# Altium PCB PCB1.PcbDoc (part 4 of 4)
Units mm, origin at the board's own origin, x right, y up, seen from the top; angles counter-clockwise.
Board outline 45.9 x 24.5 mm, 4 copper layers (Top Layer, Signal Layer 1, Signal Layer 2, Bottom Layer), stack 1.021 mm thick; 157 components, 126 nets, 564 pads, 199 vias.
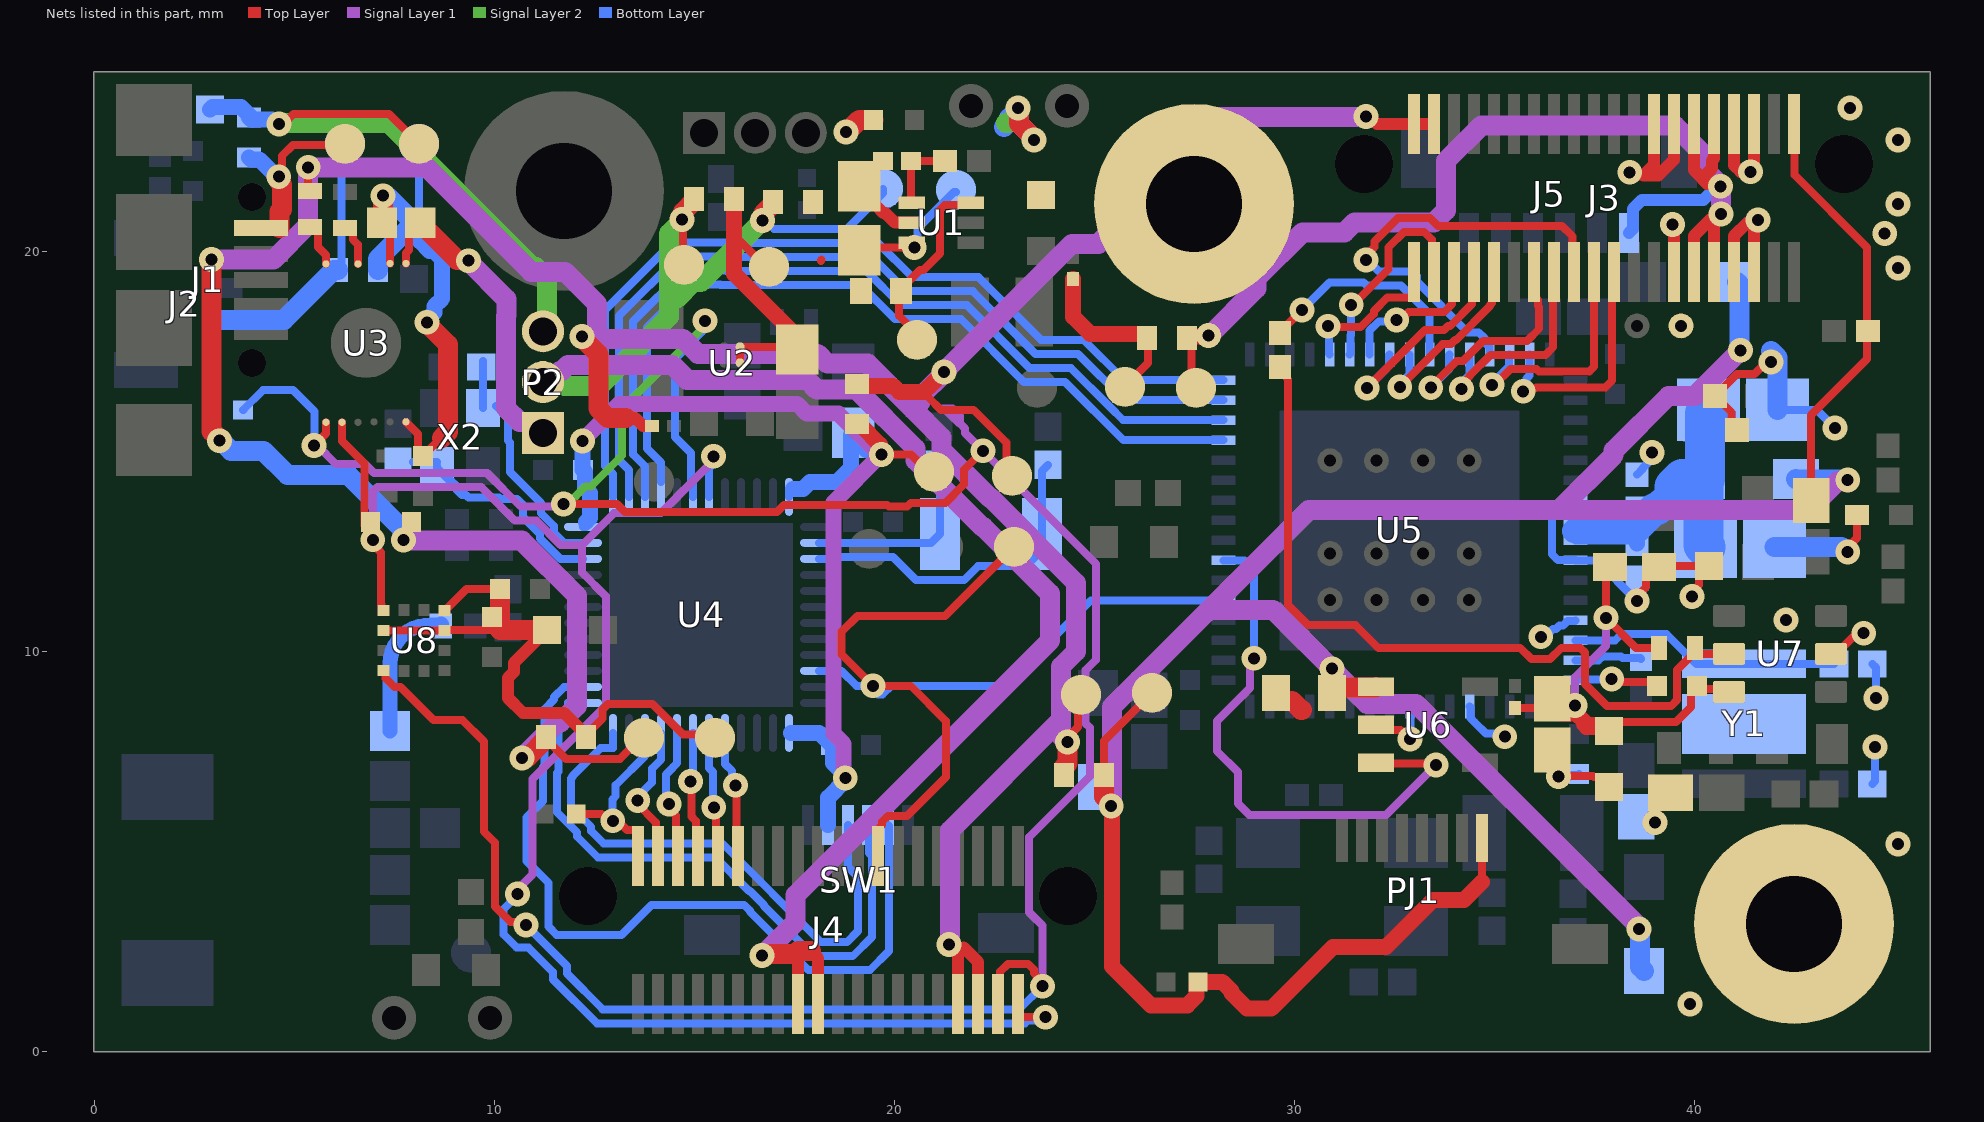
[diagram p5: the nets of this part, all layers, seen from the top]

## Via types
v1: diameter 0.62, hole 0.3, Top Layer to Bottom Layer, tented both sides, 176 vias
v2: diameter 0.62, hole 0.3, Top Layer to Bottom Layer, 17 vias
v3: diameter 0.6, hole 0.3, Top Layer to Bottom Layer, 6 vias

## Nets (pads, with @x,y where several pads share a name; then routed paths per layer and width w, separated by ;. In a path a pad name is that pad's centre, name@x,y a point inside that pad or via, vN(x,y) a via of type N, cw(c..) or ccw(c..) an arc to the next point about the centre after c; other vN are vias at no path point) (continued)
NetR3_1: R3.1 TP6.1 U1.6 | length 4.8
  Top Layer w0.2: TP6.1@20.575,17.8 20.575,17.955 20.13,18.4 20.13,19.025 20.13,19.075 20.175,19.075 20.65,19.55 20.739,19.55 21.15,19.961 21.15,21.053 21.267,21.17 21.86,21.17 U1.6@21.915,21.225
NetR4_1: R4.1 R7.2 U1.1 | length 1.9
  Top Layer w0.2: U1.1@20.445,21.225 20.425,21.245 R7.2@20.425,22.275 R4.1@21.25,22.275
NetR16_1: R16.1 U3.12 | length 1.1
  Top Layer w0.2: R16.1@5.4,20.625 5.5,20.625 5.6,20.525 5.6,20.125 5.8,19.925 U3.12@5.8,19.7
NetR17_2: R17.2 U3.10 | length 1.1
  Top Layer w0.2: R17.2@6.275,20.6 6.375,20.6 6.475,20.5 6.475,20.304 6.6,20.179 U3.10@6.6,19.7
NetR32_2: R32.2 R34.1 U7.5 | length 19.9
  Top Layer w0.2: R34.1@29.65,17.125 29.825,16.95 29.825,16.833 29.85,16.808 29.85,11.175 30.35,10.675 31.532,10.675 32.107,10.1 35.654,10.1 35.936,9.818 36.4,9.818 36.682,10.1 37.158,10.1 37.275,9.983 37.275,9.2 37.825,8.65 39.429,8.65 39.575,8.796 39.575,9.55 40.025,10 R32.2@40.025,10.05 ; R32.2@40.025,10.1 R32.2@40.025,10.05 ; U7.5@40.875,9.95 40.125,9.95 R32.2@40.025,10.05
P0.00/XL1: C19.2 U4.2 X1.1 | length 4.9
  Bottom Layer w0.2: U4.2@18.125,12.725 20.925,12.725 X1.1@21.15,12.95 21.15,14.65 C19.2@21.125,14.675
P0.01/XL2: C20.2 U4.3 X1.2 | length 8.3
  Bottom Layer w0.2: U4.3@18.125,12.325 18.5,12.325 18.525,12.35 18.62,12.35 18.645,12.375 19.971,12.375 20.546,11.8 21.754,11.8 22.104,12.15 23.3,12.15 23.7,12.55 23.7,14.525 C20.2@23.85,14.675
P0.21/Reset: SW1.3 U4.24 | length 14
  Bottom Layer w0.2: U4.24@12.975,7.975 12.975,7.6 12.666,7.6 11.96,6.894 11.96,6.867 11.921,6.828 11.921,6.136 12.43,5.627 12.43,5.524 12.74,5.214 15.705,5.214 18.176,2.742 18.822,2.742 19.1,3.02 19.1,4.375 18.85,4.625 SW1.3@18.85,5.675
PULP_RST: J4.01 R21.1 U4.22 | length 4.9
  Top Layer w0.2: R21.1@12.054,5.95 12.682,5.95 12.856,5.776 v1(12.97,5.776) ; v1@12.975,5.785 13.089,5.785 13.324,5.55 13.55,5.55 13.55,4.95 J4.01@13.6,4.9
  Bottom Layer w0.2: v1(12.97,5.776) 12.963,5.783 12.963,6.313 13.041,6.391 13.041,6.666 13.775,7.4 U4.22@13.775,7.975
PVCC: C22.2 C23.2 C30.1 C31.1 L11.2 U5.56 U5.57 | length 10.6
  Bottom Layer w0.2: U5.57@37.04,12.79 38.489,12.79 C31.1@38.575,12.704 ; U5.56@37.04,13.29 C23.2@38.315,13.29
  Bottom Layer w0.4: C31.1@38.575,12.704 38.575,13.137
  Bottom Layer w0.6: 37,13.025 37.112,13.137 38.315,13.137 38.575,13.137
  Bottom Layer w0.8: 38.575,13.137 38.792,13.354 39.008,13.571 39.089,13.571 39.411,13.893 39.411,14.025 39.511,14.125
  Bottom Layer w1: 39.511,14.125 39.711,14.325 L11.2@40.2,14.325 L11.2@40.243,14.325 ; C30.1@40.286,12.625 40.243,12.668 L11.2@40.243,14.325 ; C22.2@40.361,16.05 40.275,15.964 40.275,14.325 L11.2@40.243,14.325
RF: L5.2 R39.1 | length 3.8
  Bottom Layer w0.372: R39.1@7.4,8.025 7.4,9.708 cw(c8.354,9.708) L5.2@8.429,10.659
  Bottom Layer w0.4: L5.2@8.665,10.65 L5.2@8.435,10.659 ; L5.2@8.68,10.68 8.659,10.659 L5.2@8.435,10.659 ; L5.2@8.435,10.659 cw(c8.446,10.949) 8.433,10.659 8.429,10.659 L5.2@8.435,10.659
RxEn: R34.2 U5.42 | length 5.6
  Top Layer w0.2: R34.2@29.65,17.975 29.65,18 v1(30.2,18.55)
  Bottom Layer w0.2: v1(30.2,18.55) 30.887,19.237 31.743,19.237 31.817,19.162 32.673,19.162 33.39,18.445 U5.42@33.39,17.44
RxPwr: U5.23 U6.3 | length 14.4
  Top Layer w0.2: U6.3@32.052,7.225 32.065,7.213 33.508,7.213 v1(33.548,7.173)
  Signal Layer 1 w0.2: v1(29,9.839) 29,9.726 28.897,9.623 28.897,9.097 28.075,8.275 28.075,7.517 28.596,6.996 28.596,6.212 28.887,5.921 32.296,5.921 v1(33.548,7.173)
  Bottom Layer w0.2: U5.23@28.24,12.29 28.76,12.29 29,12.05 v1(29,9.839)
SCK: J4.25 TP10.1 U4.10 U5.21 | length 24.5
  Top Layer w0.2: J4.25@19.6,4.9 19.65,4.95 19.65,5.617 19.7,5.667 19.7,5.754 19.846,5.9 20.325,5.9 21.3,6.875 21.3,8.267 20.417,9.15 v1(19.476,9.15) 18.691,9.935 18.691,10.507 19.084,10.9 21.275,10.9 TP10.1@23,12.625
  Bottom Layer w0.2: U4.10@18.125,9.525 18.69,9.525 19.065,9.15 v1(19.476,9.15) ; v1@19.6,8.94 19.714,8.94 19.924,9.15 22.788,9.15 24.927,11.29 U5.21@28.24,11.29
SCL: J4.40 R20.2 U3.2 U4.43 U8.1 | length 44.2
  Top Layer w0.2: U3.2@6.2,15.74 6.2,15.271 6.76,14.711 6.76,13.155 6.81,13.105 6.81,13.076 6.97,12.916 6.97,12.689 7.175,12.484 7.175,11.195 7.185,11.185 7.185,11.078 7.225,11.038 U8.1@7.237,11.038 ; J4.40@23.1,1.2 23.1,0.917 23.15,0.867 v1(23.783,0.867)
  Signal Layer 1 w0.2: v1(6.97,12.802) 6.97,14.008 7.087,14.125 9.68,14.125 10.525,13.28 11.06,13.28 11.665,12.675 12.204,12.675 ; v1(10.585,3.946) 10.585,4.059 10.96,4.434 10.96,6.818 12.8,8.658 12.8,11.382 12.204,11.978 12.204,12.675 ; v1(15.485,14.89) 15.485,14.785 14.175,13.475 13.004,13.475 12.204,12.675
  Bottom Layer w0.2: v1(10.585,3.946) 10.585,3.911 10.24,3.566 10.24,2.938 10.568,2.61 10.857,2.61 11.476,1.991 11.476,1.812 12.573,0.715 23.278,0.715 23.349,0.786 23.703,0.786 v1(23.783,0.867) ; U4.43@15.375,13.875 15.375,14.576 15.405,14.606 15.405,14.81 v1(15.485,14.89)
SDA: J4.38 R19.2 U3.1 U4.42 U8.4 | length 75.6
  Top Layer w0.2: v1(5.5,15.16) 5.8,15.46 U3.1@5.8,15.74 ; U8.4@7.25,9.537 7.29,9.497 7.29,9.339 7.36,9.269 7.506,9.122 7.665,9.122 8.487,8.3 9.206,8.3 9.75,7.756 9.75,5.504 10.025,5.229 10.025,3.636 10.411,3.25 10.72,3.25 v1(10.8,3.17) ; v1(11.737,13.697) 13.077,13.697 13.274,13.5 17.078,13.5 17.253,13.675 19.831,13.675 19.87,13.635 20.331,13.635 20.42,13.725 21.286,13.725 21.75,14.189 21.75,14.554 v2(22.223,15.027) ; J4.38@22.6,1.2 22.65,1.25 22.65,2.004 22.846,2.2 23.354,2.2 23.5,2.054 23.5,1.966 23.71,1.756 v1(23.71,1.642)
  Signal Layer 1 w0.2: v1(5.5,15.16) 5.584,15.16 6.044,14.7 6.775,14.7 7,14.475 9.825,14.475 10.67,13.63 11.67,13.63 v1(11.737,13.697) ; 21.164,16.087 21.263,16.087 ; 21.64,15.71 21.263,16.087 ; v2@22.175,15.027 v2(22.223,15.027) 25.05,12.201 25.05,9.803 24.788,9.541 24.788,8.212 24.893,8.107 24.893,6.885 23.375,5.367 23.375,3.496 23.71,3.161 v1(23.71,1.642) ; v2(22.223,15.027) 21.778,15.472 21.778,15.586 21.647,15.717 21.647,15.901 21.461,16.087 21.263,16.087
  Signal Layer 2 w0.2: v1(11.737,13.697) 11.848,13.697 12.289,14.139 12.431,14.139 13.195,14.903 13.195,16.07 15.276,18.151 v1(15.276,18.276)
  Bottom Layer w0.2: R19.2@3.72,16.053 3.732,16.053 4.23,16.55 4.972,16.55 5.51,16.012 5.51,15.17 v1(5.5,15.16) ; v1(10.8,3.17) 11.826,2.144 11.826,1.957 12.718,1.065 23.133,1.065 v1(23.71,1.642) ; U4.42@14.975,13.875 14.975,14.25 14.925,14.3 14.925,14.975 14.525,15.375 14.525,17.324 v1@15.195,17.994
SIGNAL_RX: C45.1 J3.39 R33.2 | length 10.8
  Top Layer w0.2: J3.39@42.5,23.2 42.51,23.19 42.51,21.927 44.325,20.112 44.325,18.025 44.325,17.325 42.925,15.925 C45.1@42.925,13.781
Spare1_MSP_AFE: J3.14 U5.43 | length 5.8
  Top Layer w0.2: v1(33.419,16.603) 33.419,16.626 34.069,17.275 34.225,17.275 34.725,17.775 35.825,17.775 36.129,18.079 36.129,18.617 36.1,18.646 36.1,18.8 36,18.9 J3.14@36,19.5
  Bottom Layer w0.2: v1(33.419,16.603) 33.87,17.054 33.87,17.141 33.87,17.42 U5.43@33.89,17.44
Spare1_NRF_MSP: U4.40 U5.29 | length 20.5
  Bottom Layer w0.2: U4.40@14.175,14.25 14.175,14.735 13.825,15.085 13.825,18.112 14.899,19.186 15.653,19.186 15.664,19.175 19.165,19.175 20.024,18.316 21.679,18.316 23.245,16.75 24.275,16.75 25.734,15.291 U5.29@28.24,15.291
Spare1_NRF_WOLF: J4.11 U4.17 | length 3.2
  Top Layer w0.2: v1(16.034,6.664) 16.066,6.633 16.066,4.934 J4.11@16.1,4.9
  Bottom Layer w0.2: U4.17@15.775,7.975 15.775,7.2 15.954,7.021 15.954,6.744 v1(16.034,6.664)
Spare2_MSP_AFE: J3.16 U5.44 | length 5.6
  Top Layer w0.2: v1(34.189,16.572) 34.189,16.685 34.392,16.888 34.392,16.908 34.909,17.425 36.287,17.425 36.479,17.617 36.479,19.479 J3.16@36.5,19.5
  Bottom Layer w0.2: v1(34.189,16.572) 34.189,16.718 34.39,16.919 U5.44@34.39,17.44
Spare2_NRF_MSP: U4.39 U5.30 | length 21.4
  Bottom Layer w0.2: U4.39@13.775,13.875 13.775,14.64 13.475,14.94 13.475,18.257 14.754,19.536 15.798,19.536 15.809,19.525 19.31,19.525 20.169,18.666 21.824,18.666 23.39,17.1 24.42,17.1 25.385,16.135 25.729,15.791 U5.30@28.24,15.791
Spare2_NRF_WOLF: J4.09 U4.18 | length 3.2
  Top Layer w0.2: v1(15.496,6.114) 15.55,6.059 15.55,4.95 J4.09@15.6,4.9
  Bottom Layer w0.2: U4.18@15.375,7.975 15.375,7.094 15.474,6.994 15.474,6.135 v1(15.496,6.114)
Spare3_MSP_AFE: J3.18 U5.45 | length 11.1
  Top Layer w0.2: v1(31.8,19.797) 31.8,19.91 32.01,20.12 32.01,20.259 32.601,20.85 32.79,20.85 33.399,20.85 33.599,20.65 36.702,20.65 36.964,20.388 36.964,19.536 J3.18@37,19.5
  Bottom Layer w0.2: v1(31.8,19.797) 31.843,19.797 32.127,19.512 32.956,19.512 33.073,19.395 33.073,19.257 34.34,17.99 34.614,17.99 34.76,17.844 34.76,17.75 34.89,17.62 U5.45@34.89,17.44
Spare3_NRF_MSP: U4.38 U5.31 | length 21.8
  Bottom Layer w0.2: U4.38@13.375,13.875 13.375,14.545 13.125,14.795 13.125,18.402 14.609,19.886 15.943,19.886 15.954,19.875 19.455,19.875 20.314,19.016 21.969,19.016 23.535,17.45 24.6,17.45 25.759,16.291 U5.31@28.24,16.291
Spare3_NRF_WOLF: J4.07 U4.19 | length 3.2
  Top Layer w0.2: v1(14.914,6.763) 14.936,6.741 14.936,5.882 15.05,5.767 15.05,4.95 J4.07@15.1,4.9
  Bottom Layer w0.2: v1(14.914,6.763) 14.975,6.823 U4.19@14.975,7.975
Spare4_MSP_AFE: J3.22 U5.47 | length 6.1
  Top Layer w0.2: v1(35.73,16.515) 35.81,16.595 36.042,16.595 36.057,16.61 37.781,16.61 37.95,16.779 37.95,19.45 J3.22@38,19.5
  Bottom Layer w0.2: v1(35.73,16.515) 35.81,16.595 35.81,16.833 35.89,16.912 U5.47@35.89,17.44
Spare4_NRF_MSP: U4.37 U5.32 | length 22.3
  Bottom Layer w0.2: U4.37@12.975,13.875 12.975,14.45 12.775,14.65 12.775,18.547 14.464,20.236 16.088,20.236 16.098,20.225 19.6,20.225 20.459,19.366 22.114,19.366 23.68,17.8 24.745,17.8 25.754,16.791 U5.32@28.24,16.791
Spare4_NRF_WOLF: J4.05 U4.20 | length 3.3
  Top Layer w0.2: v1(14.376,6.196) 14.376,6.082 14.55,5.908 14.55,4.95 J4.05@14.6,4.9
  Bottom Layer w0.2: v1(14.376,6.196) 14.298,6.273 14.298,6.933 14.475,7.11 14.475,7.115 14.575,7.215 U4.20@14.575,7.975
Spare5_NRF_WOLF: J4.03 U4.21 | length 3.5
  Top Layer w0.2: v1(13.591,6.287) 13.591,6.188 14.05,5.73 14.05,4.95 J4.03@14.1,4.9
  Bottom Layer w0.2: v1(13.591,6.287) 13.591,6.382 13.948,6.739 13.948,7.078 14.175,7.305 U4.21@14.175,7.975
SWDCLK: SW1.4 U4.25 | length 15.7
  Bottom Layer w0.2: U4.25@12.225,8.725 11.85,8.725 11.85,8.425 11.61,8.185 11.61,7.012 11.571,6.973 11.571,5.991 12.08,5.482 12.08,5.379 12.595,4.864 15.536,4.864 16.375,4.025 16.399,4.025 16.75,3.674 16.75,3.65 18.008,2.392 18.967,2.392 19.45,2.875 19.45,4.9 19.375,4.975 19.375,5.65 SW1.4@19.35,5.675
SWDIO: SW1.5 U4.26 | length 20
  Bottom Layer w0.2: U4.26@12.225,9.125 11.755,9.125 11.5,8.87 11.5,8.807 11.26,8.567 11.26,7.157 11.221,7.118 11.221,6.271 10.815,5.865 10.815,4.771 11.36,4.226 11.36,3.132 11.567,2.925 13.188,2.925 13.938,3.675 16.254,3.675 16.4,3.529 16.4,3.505 17.863,2.042 19.395,2.042 19.875,2.522 19.875,5.65 SW1.5@19.85,5.675
Switch_CLK: J3.04 U5.38 | length 4.9
  Top Layer w0.2: v1(31.43,18.677) 31.472,18.677 32.36,19.565 32.36,20.114 32.746,20.5 32.935,20.5 33.254,20.5 33.45,20.304 33.45,20 J3.04@33.5,19.95 ; J3.04@33.459,19.541 J3.04@33.5,19.5
  Bottom Layer w0.2: U5.38@31.39,17.44 31.41,17.46 31.41,17.907 31.43,17.926 v1(31.43,18.677)
Switch_CLR: J3.02 U5.37 | length 3.8
  Top Layer w0.2: v1(30.852,18.141) 30.876,18.117 31.662,18.117 31.997,18.452 31.997,18.525 32.333,18.86 32.95,18.86 33,18.91 J3.02@33,19.5
  Bottom Layer w0.2: v1(30.852,18.141) 30.871,18.122 30.871,17.459 U5.37@30.89,17.44
Switch_D_IN: J3.06 U5.39 | length 3.8
  Top Layer w0.2: v1(32.565,18.3) 32.664,18.3 32.864,18.5 33.754,18.5 33.95,18.696 33.95,19.45 J3.06@34,19.5
  Bottom Layer w0.2: U5.39@31.89,17.44 31.89,17.937 31.89,18.03 32.123,18.264 32.528,18.264 v1(32.565,18.3)
Switch_D_OUT: J3.08 U5.40 | length 5.4
  Top Layer w0.2: v1(31.825,16.6) 33.272,18.047 33.747,18.047 33.85,18.15 33.904,18.15 34.45,18.696 34.45,19.45 J3.08@34.5,19.5
  Bottom Layer w0.2: v1(31.825,16.6) 32.26,17.035 32.37,17.145 32.37,17.42 U5.40@32.39,17.44
Switch_LE: J3.10 U5.41 | length 4.9
  Top Layer w0.2: v1(32.645,16.625) 33.718,17.697 33.922,17.697 34.025,17.8 34.054,17.8 34.9,18.646 34.9,18.675 34.95,18.725 34.95,19.45 J3.10@35,19.5
  Bottom Layer w0.2: v1(32.645,16.625) 32.645,16.691 32.89,16.936 U5.41@32.89,17.44
TxPwr: J3.20 U5.46 | length 6.1
  Top Layer w0.2: v1(34.952,16.676) 35.016,16.676 35.415,17.075 36.057,17.075 36.12,17.012 37.383,17.012 37.5,17.129 J3.20@37.5,19.5
  Bottom Layer w0.2: v1(34.952,16.676) 34.952,16.714 35.375,17.138 35.375,17.425 U5.46@35.39,17.44
USS_GND: C1.2 C2.2 C22.1 C23.1 C24.2 C27.1 C30.2 C31.2 C33.1 C36.1 C39.1 C40.1 C42.2 C43.2 C46.1 C47.2 C48.2 J3.25 J3.27 J3.28 J3.33 J3.34 J3.35 J3.36 M2.1 M4.1 NT1.1 R2.2 R7.1 R24.2 R25.2 R38.1 U1.2 U5.5 U5.8 U5.55 U5.58 U5.61 U5.64 U6.2 U7.2 Y1.2 | length 51.5
  Top Layer w0.2: U1.2@20.445,20.725 U1.2@20.5,20.78 ; U6.2@32.052,8.175 32.181,8.046 32.665,8.046 32.888,7.823 v1(32.898,7.823) ; C40.1@36.45,7.544 36.615,7.379 v1(36.615,6.887) 36.628,6.9 37.475,6.9 37.5,6.875 37.625,6.875 C47.2@37.875,6.625 ; v1(37.943,9.324) 38.023,9.244 38.981,9.244 C42.2@39.075,9.15 ; v1(38.572,11.275) 38.572,11.389 38.8,11.617 38.8,11.875 39.075,12.15 C48.2@40.375,12.15 40.125,11.9 40.125,11.676 39.95,11.501 v1(39.95,11.387) ; v1(39.027,5.731) 39.027,6.119 39.383,6.475 C43.2@39.409,6.475 ; J3.33@40.95,23.15 J3.33@41,23.2 ; R24.2@41.075,15.55 40.942,15.683 40.942,15.983 R25.2@40.525,16.4 41.075,16.95 41.511,16.95 41.811,17.25 v1(41.925,17.25) ; U7.2@43.425,9.95 43.55,9.95 43.987,10.387 44.161,10.387 v1(44.241,10.468) ; v1(43.841,12.5) 43.841,12.614 44.075,12.848 C46.1@44.075,13.425
  Top Layer w0.3: C2.2@19.13,21.643 19.13,21.545 19.511,21.164 19.54,21.164 19.737,20.968 19.785,20.968 20.023,20.73 20.44,20.73 U1.2@20.445,20.725 ; C2.2@19.175,21.786 19.511,22.122 19.547,22.122 19.7,22.275 R7.1@19.725,22.275 ; v1(38.392,21.99) 38.453,21.929 38.72,21.929 38.738,21.911 ; J3.25@39,23.2 39,22.174 38.738,21.911 ; v1(39.461,20.685) 39.5,20.646 J3.28@39.5,19.5 ; J3.27@39.5,23.2 39.5,22.3 39.111,21.911 38.738,21.911 ; J3.34@41,19.5 41,20.4 41.339,20.739 41.539,20.739 v1(41.6,20.8) 41.6,20.713 41.5,20.613 J3.36@41.5,19.5 ; J3.33@41,23.2 41,22.164 41.164,22 41.407,22 v1@41.407,21.918 ; v1@41.479,22.024 41.479,22.142 41.5,22.164 J3.35@41.5,23.2
  Top Layer w0.5: v1@18.775,22.95 18.782,22.95 19.132,23.3 R2.2@19.487,23.3 ; v1(23.1,23.6) 23.123,23.577 23.123,23.21 23.5,22.833 v1(23.5,22.8) ; C39.1@29.55,8.975 29.55,8.875 29.65,8.775 29.95,8.775 30.175,8.55 30.2,8.55
  Signal Layer 1 w0.5: v1(23.1,23.6) 23.123,23.577 23.123,23.21 23.5,22.833 v1(23.5,22.8)
  Signal Layer 2 w0.5: 22.8,23.225 22.875,23.225 22.925,23.275 ; v1(23.1,23.6) 23.123,23.577 23.123,23.21 23.5,22.833 v1(23.5,22.8)
  Bottom Layer w0.2: U5.8@32.89,8.64 32.91,8.62 32.91,7.915 32.898,7.903 v1(32.898,7.823) ; U5.5@34.39,8.64 34.41,8.62 34.41,8.346 34.52,8.236 34.796,7.96 35.19,7.96 v1(35.271,7.88) ; v1(36.168,10.378) 36.282,10.378 36.477,10.573 36.55,10.573 36.636,10.659 36.639,10.659 36.73,10.659 36.84,10.769 37.02,10.769 U5.61@37.04,10.789 ; v1(36.615,6.887) 36.646,6.919 37.094,6.919 C27.1@37.125,6.95 ; U5.64@37.04,9.289 37.058,9.307 37.925,9.307 v1(37.943,9.324) ; U5.55@37.04,13.79 37.02,13.77 36.747,13.77 36.45,13.474 36.45,12.442 36.567,12.325 36.575,12.325 36.603,12.297 37.033,12.297 U5.58@37.04,12.29 37.557,12.29 v1(38.572,11.275) ; C23.1@38.575,14.429 38.728,14.582 38.728,14.603 38.872,14.747 38.872,14.905 v1(38.952,14.985) ; C30.2@42.014,12.625 42.139,12.5 43.809,12.5 v1(43.841,12.5) ; C22.1@42.089,16.05 43.075,16.05 v1(43.525,15.6) ; C33.1@44.457,6.7 44.525,6.768 v1(44.525,7.625) ; C36.1@44.457,9.7 44.55,9.607 v1(44.55,8.85)
  Bottom Layer w0.5: 22.75,23.125 22.875,23.25 22.875,23.343 23.1,23.568 v1(23.1,23.6) 23.123,23.577 23.123,23.21 23.5,22.833 v1(23.5,22.8) ; v1@41.925,17.527 42.089,17.363 C22.1@42.089,16.05 ; C30.2@42.014,12.625 43.684,12.625 v1@43.809,12.5
  other v1: 39.9,1.2 45.1,5.2 42.3,10.8 45.1,19.6 44.766,20.457 45.1,21.2 41.409,22.002 45.1,22.8 18.8,23 43.9,23.6
USSXTIN: C36.2 U5.62 Y1.3 | length 6.8
  Bottom Layer w0.2: U5.62@37.04,10.289 38.03,10.289 38.19,10.45 39.306,10.45 40.056,9.7 Y1.3@41.25,9.7 C36.2@43.5,9.7
USSXTOUT: R28.2 U5.63 | length 1.7
  Bottom Layer w0.2: U5.63@37.04,9.789 37.616,9.789 37.711,9.884 38.175,9.884 38.217,9.842 38.658,9.842 R28.2@38.675,9.825
VBAT: P2.1 R18.2 U3.7 | length 8
  Top Layer w0.2: U3.7@7.8,19.71 7.8,19.973 7.871,20.044 7.871,20.445 R18.2@8.151,20.725
  Top Layer w0.5: R18.2@8.151,20.725 R18.2@8.281,20.595 ; R18.2@8.281,20.594 9.073,19.802 9.337,19.802 v1(9.36,19.779)
  Signal Layer 1 w0.5: v1(9.36,19.779) 9.36,19.765 10.306,18.819 10.306,18.404 10.3,18.398 10.3,16.093 10.643,15.75 10.95,15.75 P2.1@11.225,15.475
VBAT_CONN: J2.1 R5.1 TP4.1 | length 6.6
  Bottom Layer w0.2: R5.1@6.1,19.55 6.188,19.637 6.188,22.613 TP4.1@6.275,22.7
  Bottom Layer w0.5: J2.1@3.215,18.3 4.75,18.3 6,19.55 R5.1@6.1,19.55
VBAT_IN: C7.1 C8.1 R5.2 R18.1 TP5.1 U3.6 U3.8 | length 14.3
  Top Layer w0.2: R18.1@7.225,20.751 R18.1@7.199,20.725 7.4,20.524 U3.8@7.4,19.71 ; U3.6@7.8,15.75 8.1,15.45 8.1,15.025 C7.1@8.225,14.9 8.675,15.35 8.7,15.35
  Top Layer w0.5: R18.1@7.225,20.751 v1(7.225,21.405) ; v1(8.325,18.24) 8.325,18.208 8.85,17.683 8.85,15.5 8.7,15.35
  Bottom Layer w0.2: C8.1@8,20.725 8.125,20.85 TP5.1@8.125,22.7
  Bottom Layer w0.4: C8.1@8,20.725 8.15,20.575 8.15,20.259 8.384,20.025 8.495,20.025 8.7,19.82 8.7,18.83 8.51,18.64 8.51,18.485 8.325,18.3 v1(8.325,18.24)
  Bottom Layer w0.5: R5.2@7.1,19.55 7.1,19.825 C8.1@8,20.725 7.343,21.382 7.248,21.382 v1(7.225,21.405)
VCC_AFE: J3.29 J3.30 J3.31 J3.32 J5.6 R8.2 TP14.1 | length 28.8
  Top Layer w0.2: R8.2@27.325,17.85 27.437,17.738 27.437,16.713 TP14.1@27.55,16.6
  Top Layer w0.3: J3.30@40,19.5 40,20.4 v1@40.437,20.837 ; J3.29@40,23.2 40,22.048 40.176,21.872 40.237,21.872 40.45,22.085 40.45,22.285 40.5,22.335 J3.31@40.5,23.2 ; 40.195,21.83 40.326,21.699 40.602,21.699 v1(40.663,21.638) ; J3.32@40.5,19.5 40.5,20.775 v1(40.675,20.95)
  Top Layer w0.4: R8.2@27.325,17.85 27.355,17.88 27.835,17.88 v1(27.865,17.91)
  Signal Layer 1 w0.5: v1(27.865,17.91) 27.885,17.91 29.057,19.082 29.057,19.332 30.215,20.49 31.261,20.49 31.506,20.735 33.496,20.735 33.796,21.035 33.796,22.271 34.681,23.156 39.519,23.156 40.179,22.496 40.179,22.155 40.663,21.67 v1(40.663,21.638) ; v1@40.666,21.641 40.669,21.639 40.669,20.956 v1(40.675,20.95)
  Bottom Layer w0.3: J5.6@38.375,20.475 38.475,20.575 38.475,21.074 38.696,21.295 40.233,21.295 40.576,21.638 v1(40.663,21.638)
VCC_IMU: C49.1 C50.1 C51.1 R13.2 TP22.1 U8.2 U8.9 U8.10 | length 15.2
  Top Layer w0.2: U8.2@7.237,10.537 U8.9@8.762,10.537 ; U8.10@8.762,11.038 8.775,11.038 9.312,11.575 C51.1@10.15,11.575 ; U8.9@8.769,10.544 10.144,10.544 ; C49.1@10.119,10.869 C49.1@10.125,10.875 ; R13.2@12.3,7.925 12.709,8.334 12.709,8.559 12.85,8.7 13.961,8.7 14.725,7.936 15.439,7.936 TP22.1@15.525,7.85
  Top Layer w0.3: C50.1@11.325,10.55 10.5,9.725 10.5,9.501 10.35,9.351 10.35,8.845 10.72,8.475 11.75,8.475 R13.2@12.3,7.925
  Top Layer w0.5: C51.1@10.15,11.575 10.15,10.55 C50.1@11.325,10.55 ; R13.2@12.3,7.875 R13.2@12.3,7.925
VCC_MSP430: C39.2 L8.1 L9.1 L10.1 L11.1 PJ1.1 R11.2 R29.1 TP20.1 U6.1 | length 69.8
  Top Layer w0.2: R11.2@25.25,6.925 25.25,7.775 TP20.1@26.45,8.975 ; 28.206,1.75 28.249,1.75 28.486,1.513 ; 34.7,4.25 PJ1.1@34.7,5.35
  Top Layer w0.4: v1(25.43,6.15) 25.45,6.13 25.45,2.133 26.419,1.164 27.334,1.164 27.568,1.398 27.568,1.716 R29.1@27.602,1.75 28.206,1.75 28.44,1.516 28.44,1.467 28.827,1.08 29.43,1.08 30.975,2.625 32.3,2.625 33.475,3.8 34.25,3.8 34.7,4.25
  Top Layer w0.5: v1@25.25,6.382 R11.2@25.25,6.925 ; v1(30.95,9.58) C39.2@30.95,8.975 30.95,9.004 31.05,9.104 32.031,9.104 U6.1@32.052,9.125
  Signal Layer 1 w0.5: v1(25.43,6.15) 25.45,6.17 25.45,8.625 27.912,11.088 ; v1(38.625,3.075) 38.625,3.107 38.565,3.167 38.565,3.185 33.05,8.7 31.83,8.7 v1(30.95,9.58) 29.48,11.05 27.95,11.05 27.912,11.088 ; v1(41.161,17.539) 40.019,16.398 39.361,16.398 37.993,15.03 37.993,14.918 36.625,13.55 ; v1(43.841,14.3) 43.818,14.277 43.602,14.277 42.875,13.55 36.625,13.55 ; 27.912,11.088 30.375,13.55 36.625,13.55
  Bottom Layer w0.5: v1(38.625,3.075) 38.648,3.052 38.648,2.127 L8.1@38.75,2.025 ; L10.1@41.075,19.25 41.138,19.187 41.138,17.562 v1(41.161,17.539) ; L11.1@42.55,14.325 42.563,14.312 43.829,14.312 v1(43.841,14.3)
VCC_NRF52: C14.1 C15.1 C16.1 R10.2 SW1.2 TP18.1 U4.13 U4.36 U4.48 | length 29.4
  Top Layer w0.2: v1@19.643,14.978 v1(19.685,14.935) 20.423,14.935 20.934,14.425 TP18.1@21.15,14.425
  Top Layer w0.4: R10.2@19.075,15.7 19.125,15.65 19.175,15.65 19.643,15.182 v1@19.643,14.978
  Signal Layer 1 w0.4: v1(12.21,15.274) 13.136,16.2 17.575,16.2 17.821,15.954 18.607,15.954 19.626,14.935 v1(19.685,14.935) 18.481,13.731 18.481,7.96 18.741,7.7 18.741,6.892 v1(18.783,6.85)
  Bottom Layer w0.2: U4.36@12.225,13.125 12.3,13.125 12.3,13.25 ; U4.13@17.375,7.975 U4.13@17.425,7.975 ; U4.48@17.375,13.875 17.375,14.075 17.475,14.075
  Bottom Layer w0.4: v1(12.21,15.274) 12.21,14.565 12.275,14.5 12.275,14.093 12.397,13.971 12.397,13.347 12.3,13.25 ; U4.13@17.425,7.975 18.125,7.975 18.475,7.625 18.475,7.217 18.741,6.952 18.741,6.91 v1@18.681,6.85 ; 17.475,14.075 17.725,14.075 17.9,14.25 18.575,14.25 18.925,14.6 18.925,15.425 19.304,15.046 19.515,15.046 19.626,14.935 v1(19.685,14.935) ; SW1.2@18.35,5.675 18.35,6.358 18.783,6.79 v1(18.783,6.85)
VCC_RX: C40.2 C42.1 C47.1 FB3.2 R32.1 R37.2 U7.6 | length 13.6
  Top Layer w0.2: FB3.2@35.525,8.6 36.225,8.6 C40.2@36.45,8.825 36.532,8.742 36.615,8.66 v1(37.023,8.66) ; v1@37.01,8.359 37.156,8.213 37.156,8.142 37.273,8.025 C47.1@37.875,8.025 38.1,8.25 39.553,8.25 39.925,8.622 39.925,9 C42.1@40.075,9.15 40.15,9.075 40.8,9.075 U7.6@40.875,9 ; R37.2@37.9,12.125 37.8,12.025 v1(37.8,10.852) 38.552,10.1 R32.1@39.125,10.1
  Top Layer w0.4: C40.2@36.532,8.742 36.532,8.633 36.706,8.459 37.051,8.459 37.336,8.175 37.725,8.175 C47.1@37.875,8.025
  Signal Layer 1 w0.2: v1(37.023,8.66) 37.023,9.367 37.8,10.144 v1(37.8,10.852)
VSYS_3V3: FB1.2 R8.1 TP13.1 | length 4.5
  Top Layer w0.2: TP13.1@25.75,16.65 25.775,16.65 26.35,17.225 26.35,17.825 R8.1@26.325,17.85
  Top Layer w0.4: FB1.2@24.475,19.325 24.475,18.375 24.9,17.95 26.275,17.95 26.325,17.9 R8.1@26.325,17.85
VSYS_3V3_IN: C2.1 R3.2 R6.2 TP12.1 U1.3 | length 3.3
  Top Layer w0.2: 18.175,19.775 18.175,19.8 18.187,19.812 ; C2.1@19.13,20.039 19.201,20.11 v1(20.507,20.11)
  Bottom Layer w0.2: v1(20.507,20.11) 20.588,20.19 20.588,20.588 21.5,21.5 TP12.1@21.544,21.5
VSYS_IN: J4.18 J4.20 P2.2 R6.1 R9.1 TP11.1 TP15.1 | length 45.9
  Top Layer w0.2: TP15.1@14.725,19.7 v1@14.725,20.785
  Top Layer w0.3: v1(16.703,2.41) v1@16.743,2.45 ; J4.18@17.6,1.2 17.6,2.525 ; 17.924,2.525 18.1,2.349 J4.20@18.1,1.2
  Top Layer w0.5: TP15.1@14.725,19.7 TP15.1@14.75,19.675 ; v1@14.725,20.785 14.723,20.787 14.723,20.998 15,21.275 R9.1@15,21.325 ; v1(16.71,20.785) 16.733,20.808 16.733,20.958 16.975,21.2 R6.1@16.975,21.25 ; v1@16.743,2.45 17.487,2.45 ; 17.6,2.525 17.924,2.525
  Signal Layer 1 w0.5: P2.2@11.25,16.621 11.649,17.02 11.695,17.02 11.85,17.175 14.453,17.175 14.828,16.8 17.824,16.8 18.069,16.554 19.071,16.554 20.539,15.086 20.539,14.788 22.206,13.121 22.233,13.121 23.9,11.454 23.9,10.279 17.54,3.919 17.54,3.247 v1(16.703,2.41)
  Signal Layer 2 w0.5: P2.2@11.65,16.75 11.755,16.645 12.649,16.645 13.663,17.659 13.663,17.673 14.375,18.385 14.375,18.387 14.375,18.579 14.375,18.829 14.375,20.457 14.7,20.782 v1(14.7,20.81) ; 14.566,18.829 14.982,19.245 15.17,19.245 v1(16.71,20.785)
  Bottom Layer w0.2: 16.999,20.575 18.825,20.575 19.725,21.475 TP11.1@19.725,21.575
  Bottom Layer w0.5: P2.2@11.275,16.775 11.3,16.775 P2.2@11.325,16.75
VSYS_MCU: FB2.2 J3.01 J3.03 J4.34 J4.36 R10.1 R11.1 R13.1 R16.2 R19.1 R20.1 TP17.1 TP19.1 TP21.1 | length 95.3
  Top Layer w0.2: v1(5.353,22.115) 5.353,21.572 R16.2@5.4,21.525 ; R13.1@11.3,7.825 11.8,7.325 13.144,7.325 13.669,7.85 TP21.1@13.75,7.85 ; 20.855,16.605 20.855,16.367 21.173,16.05 21.992,16.05 22.783,15.259 22.783,15.255 22.808,15.23 22.808,14.517 22.925,14.4 TP17.1@22.95,14.4 ; v1(24.333,7.745) 24.333,7.859 24.6,8.125 24.6,8.85 TP19.1@24.675,8.925
  Top Layer w0.3: 13.3,15.845 13.53,15.845 13.725,15.65 FB2.2@13.95,15.65 ; J4.34@21.6,1.2 21.6,2.363 ; 21.736,2.614 22.1,2.25 J4.36@22.1,1.2 ; v1(31.801,23.384) 31.888,23.384 32.072,23.2 J3.03@33.5,23.2
  Top Layer w0.4: R10.1@19.075,16.7 19.125,16.65 19.975,16.65 20.125,16.5 20.75,16.5 ; 20.855,16.605 v1(21.25,17)
  Top Layer w0.5: v1(2.94,19.81) 2.94,15.512 3.14,15.312 v1(3.14,15.28) ; v1(10.7,7.35) 10.723,7.373 10.848,7.373 11.3,7.825 R13.1@11.3,7.875 ; v1(12.201,17.885) 12.201,17.853 12.61,17.444 12.61,16.079 12.844,15.845 13.3,15.845 ; R11.1@24.25,6.925 24.25,7.121 24.333,7.205 v1(24.333,7.745)
  Signal Layer 1 w0.5: v1(2.94,19.81) 4.49,19.81 5.35,20.67 5.35,22.115 8.31,22.115 10.925,19.5 11.775,19.5 12.575,18.7 12.575,17.885 ; v1(7.74,12.795) 7.755,12.78 10.695,12.78 12.075,11.4 12.075,8.65 11.664,8.239 11.589,8.239 v1(10.7,7.35) ; v1(12.201,17.885) 12.575,17.885 ; v1(21.375,2.685) 21.397,2.707 21.397,5.528 24.177,8.307 ; v1(24.333,7.745) 24.177,7.901 24.177,8.307 ; v1(31.801,23.384) 31.793,23.375 26.988,23.375 25.6,21.987 25.6,20.693 25.107,20.2 24.45,20.2 v1(21.25,17) 21.25,16.968 20.664,16.382 20.664,16.25 20.479,16.065 ; 12.575,17.885 12.575,17.825 14.723,17.825 15.098,17.45 18.093,17.45 18.339,17.204 19.34,17.204 20.479,16.065 ; 20.479,16.065 21.189,15.355 21.189,15.057 22.403,13.843 22.431,13.843 24.55,11.723 24.55,10.01 24.177,9.637 24.177,8.307
  Bottom Layer w0.5: v1(3.14,15.28) 3.172,15.28 3.425,15.028 R19.1@3.72,15.028 4.233,15.028 4.84,14.42 6.357,14.42 7.717,13.059 7.717,12.818 v1(7.74,12.795)
VSYS_MCU_IN: C3.1 R9.2 TP16.1 U2.B1 U2.C1 | length 7.6
  Top Layer w0.2: 16,20.388 16.037,20.388 16.8,19.625 TP16.1@16.875,19.625 ; U2.B1@16.15,17.225 U2.C1@16.15,17.625 17.405,17.625 C3.1@17.55,17.48 ; C3.1@17.45,18 17.55,17.9 C3.1@17.55,17.48 ; C3.1@17.575,17.455 C3.1@17.55,17.48
  Top Layer w0.4: R9.2@16,21.325 16,20.856 16,20.388 16,19.45 C3.1@17.45,18
VUSB: C9.1 P2.3 R1.2 TP3.1 | length 15.6
  Top Layer w0.2: v1(4.625,23.2) 4.739,23.2 4.989,23.45 7.375,23.45 TP3.1@8.125,22.7
  Signal Layer 2 w0.5: v1(4.625,23.2) 4.648,23.223 5.598,23.223 5.6,23.225 7.363,23.225 10.963,19.625 11.032,19.625 11.325,19.332 P2.3@11.325,18.02
  Bottom Layer w0.4: C9.1@2.9,23.56 2.96,23.62 3.68,23.62 3.96,23.34 R1.2@3.96,23.31 ; R1.2@3.88,23.36 3.93,23.31 R1.2@3.96,23.31 ; R1.2@3.96,23.3 R1.2@3.96,23.31 ; v1@4.64,23.2 v1(4.625,23.2) 4.565,23.2 4.455,23.31 R1.2@3.96,23.31
VUSB_CONN: J1.1 R1.1 TP2.1 | length 5.1
  Top Layer w0.2: J1.1@4.175,20.6 J1.1@4.643,20.6 ; v1(4.62,21.88) 4.7,21.96 4.7,22.4 4.975,22.675 6.25,22.675 TP2.1@6.275,22.7
  Top Layer w0.5: v1(4.62,21.88) 4.643,21.857 4.643,21.743 4.7,21.686 4.7,21.064 4.643,21.007 J1.1@4.643,20.6
  Bottom Layer w0.4: R1.1@3.88,22.36 3.93,22.31 4.13,22.31 4.58,21.86 v1@4.68,21.86
XC1: C21.1 U4.34 X2.1 | length 5.5
  Bottom Layer w0.2: 7.975,14.75 X2.1@8.575,14.75 ; X2.1@8.575,14.65 8.575,14.6 8.9,14.275 8.933,14.275 9.05,14.158 9.05,14.071 9.196,13.925 9.3,13.925 9.363,13.862 10.123,13.862 10.16,13.825 10.579,13.825 10.725,13.679 10.725,13.375 11.15,12.95 11.15,12.835 11.66,12.325 U4.34@12.225,12.325
XC2: C18.1 U4.35 X2.3 | length 5.8
  Bottom Layer w0.2: X2.3@9.725,16.1 C18.1@9.725,17.271 ; X2.3@10.054,16.146 10.35,15.85 10.35,15.279 10.4,15.229 10.4,14.499 11.177,13.721 11.177,13.465 11.5,13.143 11.5,12.98 11.755,12.725 U4.35@12.225,12.725
pads on no net: B1.2 J1.2 J1.3 J1.4 J1.MH1 J1.MH2 J2.3 J2.4 J3. J3.09 J3.11 J3.13 J3.15 J3.17 J3.19 J3.21 J3.23 J3.26 J4. J4.02 J4.04 J4.06 J4.08 J4.10 J4.12 J4.14 J4.16 J4.39 J5.S1 J5.S2 PJ1.0 SW1.0 U3.4 U3.9 U3.11 U4.44 U5.3 U5.4 U5.24 U5.25 U5.27 U5.50 U5.51 U5.52 U6.4

## Polygon pours and split planes (outlines as drawn)
GND on Signal Layer 2 "GND_L03_P014" (solid, remove dead copper, pour order 14): 5.602,13.479 -1.18,13.479 -1.18,24.2 41,24.2 41,-2.296 5.602,-2.296
USS_GND on Signal Layer 2 "USS_GND_L03_P000" (solid, pour order 0): 28.794,9.663 29,9.457 29,6.2 37,6.2 38,5.2 38,-0.8 46.5,-0.8 46.5,25.2 18,25.2 18,20.2 39,20.2 39,15.7 35.5,15.7 35.5,9.7
GND on Top Layer "GND_L01_P024" (solid, remove dead copper, pour order 24): 5.602,13.479 -1.18,13.479 -1.18,24.2 41,24.2 41,-2.296 5.602,-2.296
USS_GND on Top Layer "USS_GND_L01_P023" (solid, pour order 23): 28.794,9.663 29,9.457 29,6.2 37,6.2 38,5.2 38,-0.8 46.5,-0.8 46.5,25.2 18,25.2 18,20.2 39,20.2 39,15.7 35.5,15.7 35.5,9.7
VSYS_3V3_IN on Top Layer "VSYS_3V3_IN_L01_P022" (solid, pour order 22): 20.75,20.075 20.325,20.075 19.45,19.2 19.45,18.7 19.125,18.7 18.625,19.2 18.625,19.425 18.1,19.425 17.9,19.625 17.9,20.2 17.725,20.375 17.725,21.05 17.825,21.05 18,21.225 18.2,21.025 18.2,20.975 18.375,20.975 18.725,20.625 19.475,20.625 19.725,20.375 20.15,20.375
GND on Top Layer "GND_L01_P001" (solid, pour order 1): 16.15,16.825 16.075,16.75 16.075,16.575 15.751,16.251 15.751,14.357 18.468,14.357 18.36,14.465 18.36,16.54 18.325,16.575 16.775,16.575 16.5,16.85 16.475,16.825
USS_GND on Top Layer "USS_GND_L01_P021" (solid, pour order 21): 19.925,21.05 19.975,21.1 19.975,22.75 19.825,22.9 19.675,22.75 18.675,22.75 18.525,22.6 18.6,22.525 18.6,21.025 18.8,20.825 19.7,20.825
NetL1_1 on Top Layer "NETL1_1_L01_P020" (solid, pour order 20): 21.45,19.3 21.45,19.9 21.75,20.2 22.125,20.2 22.25,20.075 22.25,19.475 22.375,19.35 22.05,19.025 21.925,19.025
NetC1_1 on Top Layer "NETC1_1_L01_P019" (solid, pour order 19): 23.975,19.35 24.525,19.9 24.5,19.9 24.025,20.375 23.1,20.375 22.8,20.075 22.8,19.75 23.05,19.5 23.05,19.325 23.35,19.025 23.85,19.025
NetL2_1 on Top Layer "NETL2_1_L01_P016" (solid, pour order 16): 15.275,17.125 14.875,17.125 14.5,17.5 14.5,18.6 14.7,18.8 15.4,18.1 15.4,17.575 15.675,17.3
VSYS_MCU_IN on Top Layer "VSYS_MCU_IN_L01_P018" (solid, pour order 18): 16.225,17.675 16.4,17.85 16.4,18.925 16.575,18.925 17.475,18.025 17.475,17.175 17.3,17.175 17.05,16.925 16.8,16.925 16.2,17.525 16.2,17.575
NetC4_1 on Top Layer "NETC4_1_L01_P015" (solid, pour order 15): 15.625,16.825 15.625,16.2 15.175,15.75 14.35,15.75 13.9,16.2 13.9,16.45 14.675,16.45 14.7,16.475 15.025,16.15 15.025,16.075
GND on Signal Layer 1 "GND_L02_P009" (solid, remove dead copper, pour order 9): 5.602,13.479 -1.18,13.479 -1.18,24.2 41,24.2 41,-2.296 5.602,-2.296
USS_GND on Signal Layer 1 "USS_GND_L02_P002" (solid, pour order 2): 28.794,9.663 29,9.457 29,6.2 37,6.2 38,5.2 38,-0.8 46.5,-0.8 46.5,25.2 18,25.2 18,20.2 39,20.2 39,15.7 35.5,15.7 35.5,9.7
GND on Bottom Layer "NONET_L-01_P-001" (solid, remove dead copper, pour order 25): 5,14 5,-1 12,-1 12,14
GND on Bottom Layer "GND_L04_P013" (solid, remove dead copper, pour order 13): 10.55,13.479 -1.18,13.479 -1.18,24.2 41,24.2 41,-2.296 10.55,-2.296
USS_GND on Bottom Layer "USS_GND_L04_P008" (solid, pour order 8): 28.794,9.663 29,9.457 29,6.2 37,6.2 38,5.2 38,-0.8 46.5,-0.8 46.5,25.2 18,25.2 18,20.2 39,20.2 39,15.7 35.5,15.7 35.5,9.7

## Keep-outs
Keep-Out Layer:
  the board outline again, w0.1

## Other copper
Top Layer:
  pour cut-out: 5.5,0 5.5,13.5 6.9,13.5 6.9,8.525 7.9,8.525 7.9,0
Signal Layer 1:
  pour cut-out: 5.5,0 5.5,13.5 6.9,13.5 6.9,8.525 7.9,8.525 7.9,0
Signal Layer 2:
  pour cut-out: 5.5,0 5.5,13.5 6.9,13.5 6.9,8.525 7.9,8.525 7.9,0
Bottom Layer:
  pour cut-out: 5.5,0 5.5,13.5 6.9,13.5 6.9,8.525 7.9,8.525 7.9,0

## Silkscreen, mask and mechanical layers (free items; w line width, h text height)
Top Overlay:
  drawing of 41 lines, arcs and shapes, not listed
  text "I USB" at 6.05,23.625 h0.5
  text "I MCU" at 14.95,18.425 h0.5
  text "I AFE aft. reg." at 25.025,15.292 h0.5
  text "I nRF52" at 20.425,15.225 h0.5
  text "U MCU" at 15.075,13.5 h0.5
  text "SPI" at 17.325,12.325 h0.5
  text "SCK" at 23.4,10.2 h0.5 r90
  text "I MSP430" at 23.9,9.925 h0.5
  text "MOSI" at 19.7,9.825 h0.5 r90
  text "MISO" at 21.475,9.725 h0.5 r90
  text "I IMU" at 14.025,6.425 h0.5
  text "Sebastian Frey" at 1.508,1.05 h0.8 r90
  text "WULPUS v1.2.4" at 2.95,1.05 h0.8 r90
Bottom Overlay:
  lines w0.1: 5.6,22.05 5.6,23.375 8.8,23.375 8.8,22.05 5.6,22.05 ; 8.75,1.8 8.75,3.15 10.1,3.15 10.1,1.8 8.75,1.8 ; 19.05,20.85 22.275,20.85 22.275,22.25 19.05,22.25 19.05,20.85
  lines w0.2: 17.7,7.775 18.05,7.775
  text "I BATT" at 8.575,21.325 h0.5
  text "I AFE bef. reg." at 24.15,20.067 h0.5
  text "GND" at 11.75,2.275 h0.5
Mechanical 1:
  the board outline again, w0.7

## Text inside footprints (layer, text, board x,y; h text height)
J1: Mechanical 2 "PCB Edge" at -0.6,20.5 h0.41 r270
U6: Top 3D Body "*" at 32.437,8.363 h1.27; Top Overlay "*" at 31.481,9.455 h0.5